# Altium PCB LedController.PcbDoc
Units mm, origin at the board's own origin, x right, y up, seen from the top; angles counter-clockwise.
Board outline 152.4 x 101.6 mm, 2 copper layers (Top Layer, Bottom Layer); 14 components, 19 nets, 64 pads, 1 vias.
Unrouted connection lines stored in the file: 26.
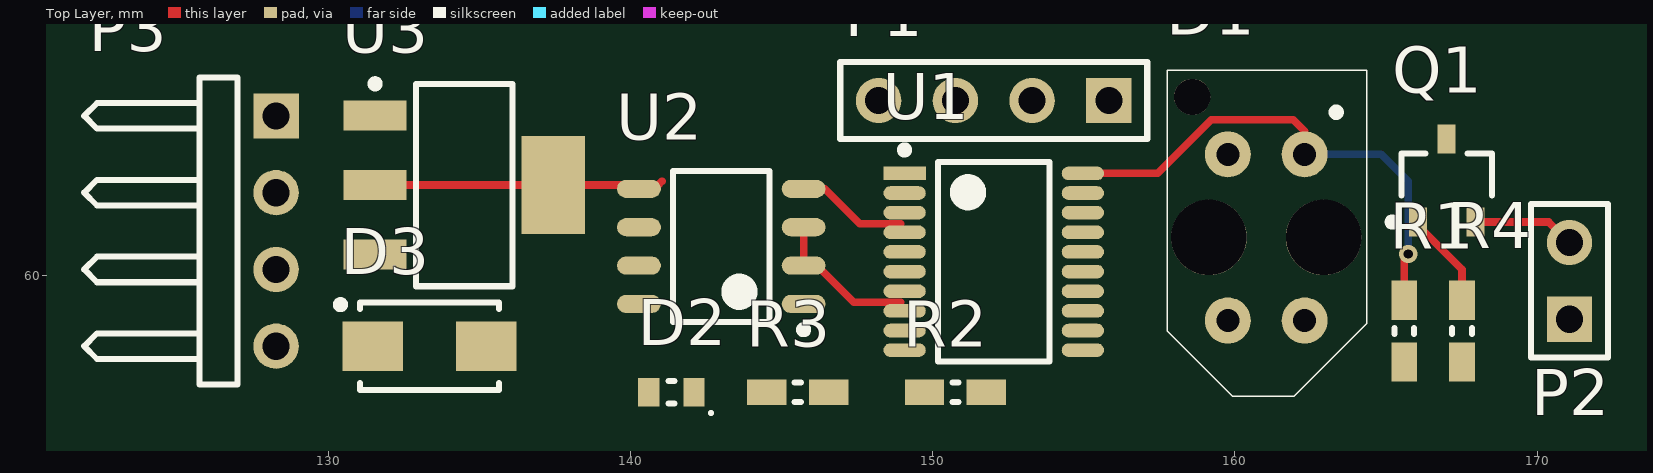
[diagram p0: Top Layer view]
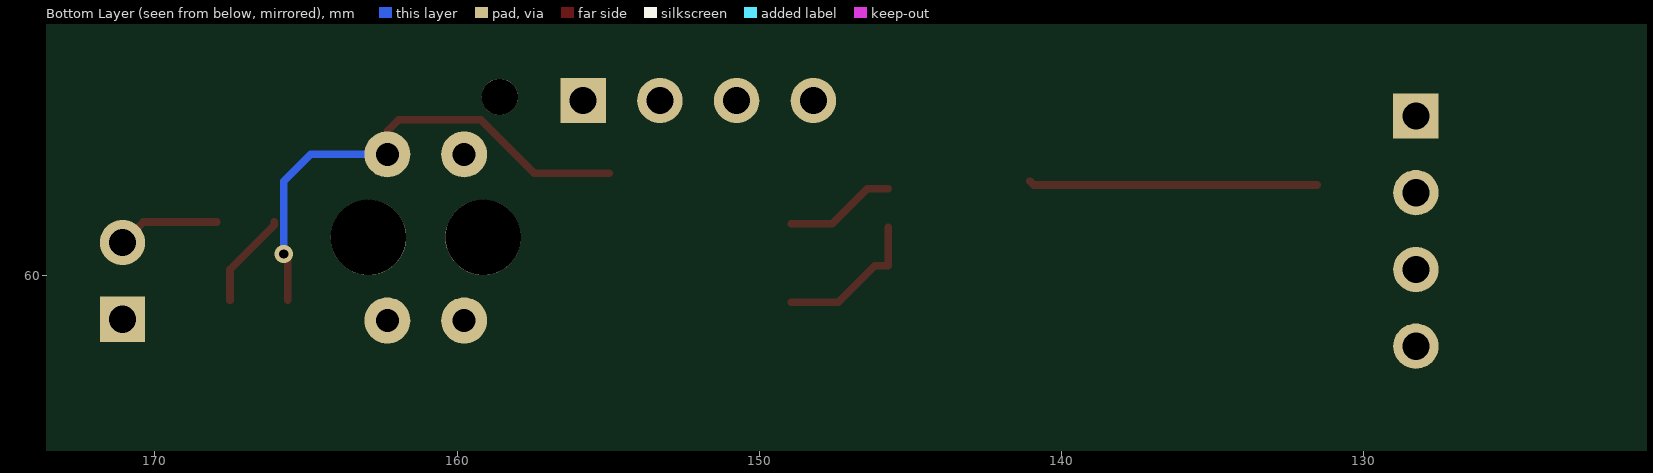
[diagram p1: Bottom Layer view, seen from below]

## Layer stack, top to bottom
Top Solder: solder mask 0.0102, Solder Resist, Dk 3.5
Top Layer: signal copper 0.0356
Dielectric 1: dielectric 0.32, FR-4, Dk 4.8
Bottom Layer: signal copper 0.0356
Bottom Solder: solder mask 0.0102, Solder Resist, Dk 3.5

## Board outline
25.4,25.4 177.8,25.4 177.8,127 25.4,127

## Design rules (kind name [scope] priority, off if disabled: settings)
Clearance [All] p1: gap=0.254 ignorepadtopadclearanceinfootprint=FALSE except(0: Arc-Hole Track-Hole SMDPad-Hole THPad-Hole Via-Hole Fill-Hole Poly-Hole Region-Hole Text-Hole)
PolygonConnect [All] p1: connectstyle=Relief reliefconductorwidth=0.254 reliefentries=4 polygonreliefangle="90 Angle" airgapwidth=0.254
RoomDefinition Power [InComponentClass('Power')] p1: confinementstyle=ConfineIn formatcopy=TRUE lockcomponents=FALSE outline 178.943,57.404 200.914,57.404 200.914,70.612 178.943,70.612
RoomDefinition LedController [InComponentClass('LedController')] p2: confinementstyle=ConfineIn formatcopy=TRUE lockcomponents=FALSE outline 178.943,42.926 224.409,42.926 224.409,56.134 178.943,56.134
RoomDefinition IRController [InComponentClass('IRController')] p3: confinementstyle=ConfineIn formatcopy=TRUE lockcomponents=FALSE outline 178.943,26.797 196.977,26.797 196.977,41.656 178.943,41.656
RoutingVias [All] p1: holewidth=0.3 width=0.6 viastyle="Through Hole" minholewidth=0.3 minwidth=0.6 maxholewidth=0.711 maxwidth=0.6
SolderMaskExpansion [All] p1: expansion=0.102
Width [All] p1: maxlimit=0.254 minlimit=0.254 preferedwidth=0.254
30 further rules are at their usual default settings.

## Classes and differential pairs
component class Power: D3 P3 U3
component class LedController: D2 P1 P2 Q1 R3 R4 U1 U2
component class IRController: D1 R1 R2

## Components (designator, comment, footprint, x,y, rotation, side; value= is the part's Value field where it differs from the comment)
D1 "TCRT5000" TCRT5000 163.986,65.908 r270 top
D2 "LED0603" DIOC1608X06N 141.351,56.134 r180 top
D3 "1N4007" SODFL504X244-2N 133.35,57.658 r0 top
P1 "" HDR1X4 155.829,65.786 r180 top
P2 "" HDR1X2 171.069,58.547 r90 top
P3 "" HDR1X4H 128.27,65.278 r270 top
Q1 "AO3400" SOT95P278X125-3N 167.005,63.141 r90 top
R1 "10K" RESC2608X06N_0603 165.608,58.157 r90 top
R2 "100R" RESC2608X06N_0603 150.749,56.134 r180 top
R3 "470R" RESC2608X06N_0603 145.533,56.134 r0 top
R4 "1K" RESC2608X06N_0603 167.513,58.157 r270 top
U1 "STM8S003" TSOP65P640X120-20N 152.019,60.452 r0 top value=STM8S003F3
U2 "MAX485" SOIC127P600X175-8N 143.002,60.96 r180 top
U3 "LM117-5V" SOT230P700X180-4N 134.493,62.992 r0 top

## Footprints (in the part's own frame and the unit in brackets; to place one, negate y for a bottom-side part, rotate by r counter-clockwise, add the part's x,y. Pads: shape width x height; smd on the part's side, far side on the other; paste and mask are expansions set on the pad)
DIOC1608X06N [mm] "Chip Diode, 2-Leads, Body 1.60x0.80mm, IPC Medium Density"
  rect 0.7x0.95 smd: 1(-0.75,0) 2(0.75,0)
  silkscreen extent -1.36,-0.38 0.1,0.74, body extent -0.9,-0.4 0.9,0.4, height 0.6
HDR1X2 [mm] "Connector; Header; 2 Position"
  rect 1.5x1.5 hole 0.9: 1(0,0)
  round 1.5 hole 0.9: 2(2.54,0)
  silkscreen extent -1.27,-1.27 3.81,1.27
HDR1X4 [mm] "Connector; Header; 4 Position"
  rect 1.5x1.5 hole 0.9: 1(0,0)
  round 1.5 hole 0.9: 2(2.54,0) 3(5.08,0) 4(7.62,0)
  silkscreen extent -1.27,-1.27 8.89,1.27
HDR1X4H [mm] "Connector; Header; 4 Position; Right Angle"
  rect 1.5x1.5 hole 0.9: 1(0,0)
  round 1.5 hole 0.9: 2(2.54,0) 3(5.08,0) 4(7.62,0)
  silkscreen extent -1.27,-6.35 8.89,-1.27
RESC2608X06N_0603 [mm] "Chip Resistor, 2-Leads, Body 2.60x0.80mm, IPC Medium Density"
  rect 1.3x0.85 smd: 1(-1.025,0) 2(1.025,0)
  silkscreen extent -0.1,-0.33 0.1,0.33, body extent -1.3,-0.4 1.3,0.4, height 0.6
SODFL504X244-2N [mm] "SODFL, 2-Leads, Body 2.70x5.04mm, IPC Medium Density"
  rect 2x1.65 smd: 1(-1.875,0) 2(1.875,0)
  silkscreen extent -3.07,-1.45 2.3,1.5, body extent -2.3,-1.45 2.3,1.45, height 2.44
SOIC127P600X175-8N [mm] "SOIC, 8-Leads, Body 4.90x3.90mm, Pitch 1.27mm, IPC Medium Density"
  oval 1.45x0.6 smd: 1(-2.725,1.905) 2(-2.725,0.635) 3(-2.725,-0.635) 4(-2.725,-1.905) 5(2.725,-1.905) 6(2.725,-0.635) 7(2.725,0.635) 8(2.725,1.905)
  silkscreen extent -2.85,-2.5 1.6,2.88, body extent -2,-2.5 2,2.5, height 1.75
SOT95P278X125-3N [mm] "SOT23, 3-Leads, Body 2.92x2.78mm, Pitch 0.95mm, IPC Medium Density"
  rect 0.95x0.6 smd: 1(-1.375,0.95) 2(-1.375,-0.95) 3(1.375,0)
  silkscreen extent -1.5,-1.5 0.9,1.92, body extent -0.9,-1.52 0.9,1.52, height 1.25
SOT230P700X180-4N [mm] "SOT223, 4-Leads, Body 6.50x7.00mm (avg), Pitch 2.30mm, IPC Medium Density"
  rect 2.1x1 smd: 1(-2.95,2.3) 2(-2.95,0) 3(-2.95,-2.3)
  rect 2.1x3.25 smd: 4(2.95,0)
  silkscreen extent -3.07,-3.35 1.6,3.47, body extent -1.85,-3.35 1.85,3.35, height 1.8
TCRT5000 [mm] "IR Transmitter And Receiver"
  round 1.524 hole 0.762: 1(1.9,-1.68) 2(1.9,-4.22) 3(7.4,-4.22) 4(7.4,-1.68)
  round 2.5 hole 2.5: 5(4.65,-4.85) 6(4.65,-1.05)
  round 1.2 hole 1.2: 7(0,-5.4)
  silkscreen extent -0.89,-6.22 9.91,0.38, body extent -0.4,-6.35 9.8,0.45, height 1.5
TSOP65P640X120-20N [mm] "TSOP, 20-Leads, Body 6.50x4.40mm, Pitch 0.65mm, IPC Medium Density"
  rect 1.4x0.45 smd: 1(-2.95,2.925)
  oval 1.4x0.45 smd: 2(-2.95,2.275) 3(-2.95,1.625) 4(-2.95,0.975) 5(-2.95,0.325) 6(-2.95,-0.325) 7(-2.95,-0.975) 8(-2.95,-1.625) 9(-2.95,-2.275) 10(-2.95,-2.925) 11(2.95,-2.925) 12(2.95,-2.275) 13(2.95,-1.625) 14(2.95,-0.975) 15(2.95,-0.325) 16(2.95,0.325) 17(2.95,0.975) 18(2.95,1.625) 19(2.95,2.275) 20(2.95,2.925)
  silkscreen extent -3.07,-3.3 1.85,3.82, body extent -3.2,-3.3 3.2,3.3, height 1.2

## Part data
D1: library part LED0603, "LED0603"
D2: library part TCRT5000
D3: library part "1N4007_SMD Diode", "1N4007_SMD"
P1: library part "Header 2", "Header, 2-Pin", LatestRevisionDate=17-Jul-2002, LatestRevisionNote="Re-released for DXP Platform.", Publisher="Altium Limited"
P2: library part "Header 4", "Header, 4-Pin", LatestRevisionDate=17-Jul-2002, LatestRevisionNote="Re-released for DXP Platform.", Publisher="Altium Limited"
P3: library part "Header 4H", "Header, 4-Pin, Right Angle", LatestRevisionDate=17-Jul-2002, LatestRevisionNote="Re-released for DXP Platform.", Publisher="Altium Limited"
Q1: library part "AO3400  MOSFET SOT23-3", "AO3400  MOSFET SOT23-3"
R1: library part 1k_0603_5%, "Thick Film Resistors - SMD 0603 1kOHMS 5% 1/10WATT", Supplier Part Number 1=541-10.0KSCT-ND, Supplier 1=Digi-Key
R2: library part Res1, "Resistor", Supplier Part Number 1=CR0603-JW-101ELFCT-ND, Supplier 1=Digi-Key
R3: library part R470_0603_5%, "Thick Film Resistors - SMD 470 ohm 5%", Supplier Part Number 1=CR0603-JW-471ELFCT-ND, Supplier 1=Digi-Key
R4: library part 1k_0603_5%, "Thick Film Resistors - SMD 0603 1kOHMS 5% 1/10WATT", Supplier Part Number 1=CR0603-JW-101ELFCT-ND, Supplier 1=Digi-Key
U1: library part "CJA1117B-5.0 SOT89", "CJA1117B-5.0 SOT89 Power IC 1A 5V_IC", Supplier Part Number 1=497-18051-1-ND
U2: library part Max485SOIC8P, "IC TXRX RS485/RS422 LOWPWR 8SOIC", Supplier Part Number 1=MAX485CSA+-ND, Supplier 1=Digi-Key
U3: library part N76E003, "IC MCU 8BIT 18KB FLASH 20TSSOP"

## Via types
v1: diameter 0.6, hole 0.3, Top Layer to Bottom Layer, 1 vias

## Nets (pads, with @x,y where several pads share a name; then routed paths per layer and width w, separated by ;. In a path a pad name is that pad's centre, name@x,y a point inside that pad or via, vN(x,y) a via of type N, cw(c..) or ccw(c..) an arc to the next point about the centre after c; other vN are vias at no path point)
GND: D1.2 P1.1 P3.1 Q1.3 U1.7 U2.8 U3.1
NetD1_1: D1.1 R1.2 U1.20 | length 16.8
  Top Layer w0.254: U1.20 157.442,63.377 159.216,65.151 161.925,65.151 162.306,64.77 D1.1 ; R1.2 165.608,60.579 v1(165.735,60.706)
  Bottom Layer w0.254: D1.1 164.846,64.008 165.735,63.119 v1(165.735,60.706)
NetD1_3: D1.3 R2.1
NetD2_1: D2.1 R3.1
NetD3_2: D3.2 U3.3
NetP2_2: P2.2 Q1.2 | length 3.4
  Top Layer w0.254: Q1.2 170.39,61.766 P2.2
NetP3_2: P3.2 U2.6
NetP3_3: P3.3 U2.7
NetQ1_1: Q1.1 R4.1 | length 3.2
  Top Layer w0.254: Q1.1 166.055,61.656 167.513,60.198 R4.1
NetR2_2: R2.2 U1.10
NetR3_2: R3.2 U1.11
NetU1_2: U1.2 U2.4 | length 3.7
  Top Layer w0.254: U2.4 146.431,62.865 147.585,61.711 148.942,61.711
NetU1_3: U1.3 U2.1
NetU1_6: U1.6 U2.2 U2.3 | length 5
  Top Layer w0.254: U2.3 U2.2 146.177,60.325 147.391,59.111 148.942,59.111
NRST: P1.2 U1.4
POWER_LED: R4.2 U1.1
SWIM: P1.3 U1.18
VCC_5V: D1.4 D2.2 P1.4 R1.1 U1.9 U2.5 U3.2 U3.4 | length 9.5
  Top Layer w0.254: U3.2 U3.4 140.912,62.992 141.039,63.119
VCC_12V: D3.1 P2.1 P3.4
pads on no net: D1.5 D1.6 D1.7 U1.5 U1.8 U1.12 U1.13 U1.14 U1.15 U1.16 U1.17 U1.19